# Altium PCB PC110-itx.PcbDoc (part 15 of 16)
Units mm, origin at the board's own origin, x right, y up, seen from the top; angles counter-clockwise.
Board outline 170 x 170 mm, 16 copper layers (FC1, FC2, FC3, FC4, IP1, IC1, IC2, IP2, IP3, IC3, IC4, IP4, BC4, BC3, BC2, BC1), stack 3.903 mm thick; 935 components, 1357 nets, 4698 pads, 3240 vias.
Unrouted connection lines stored in the file: 552.
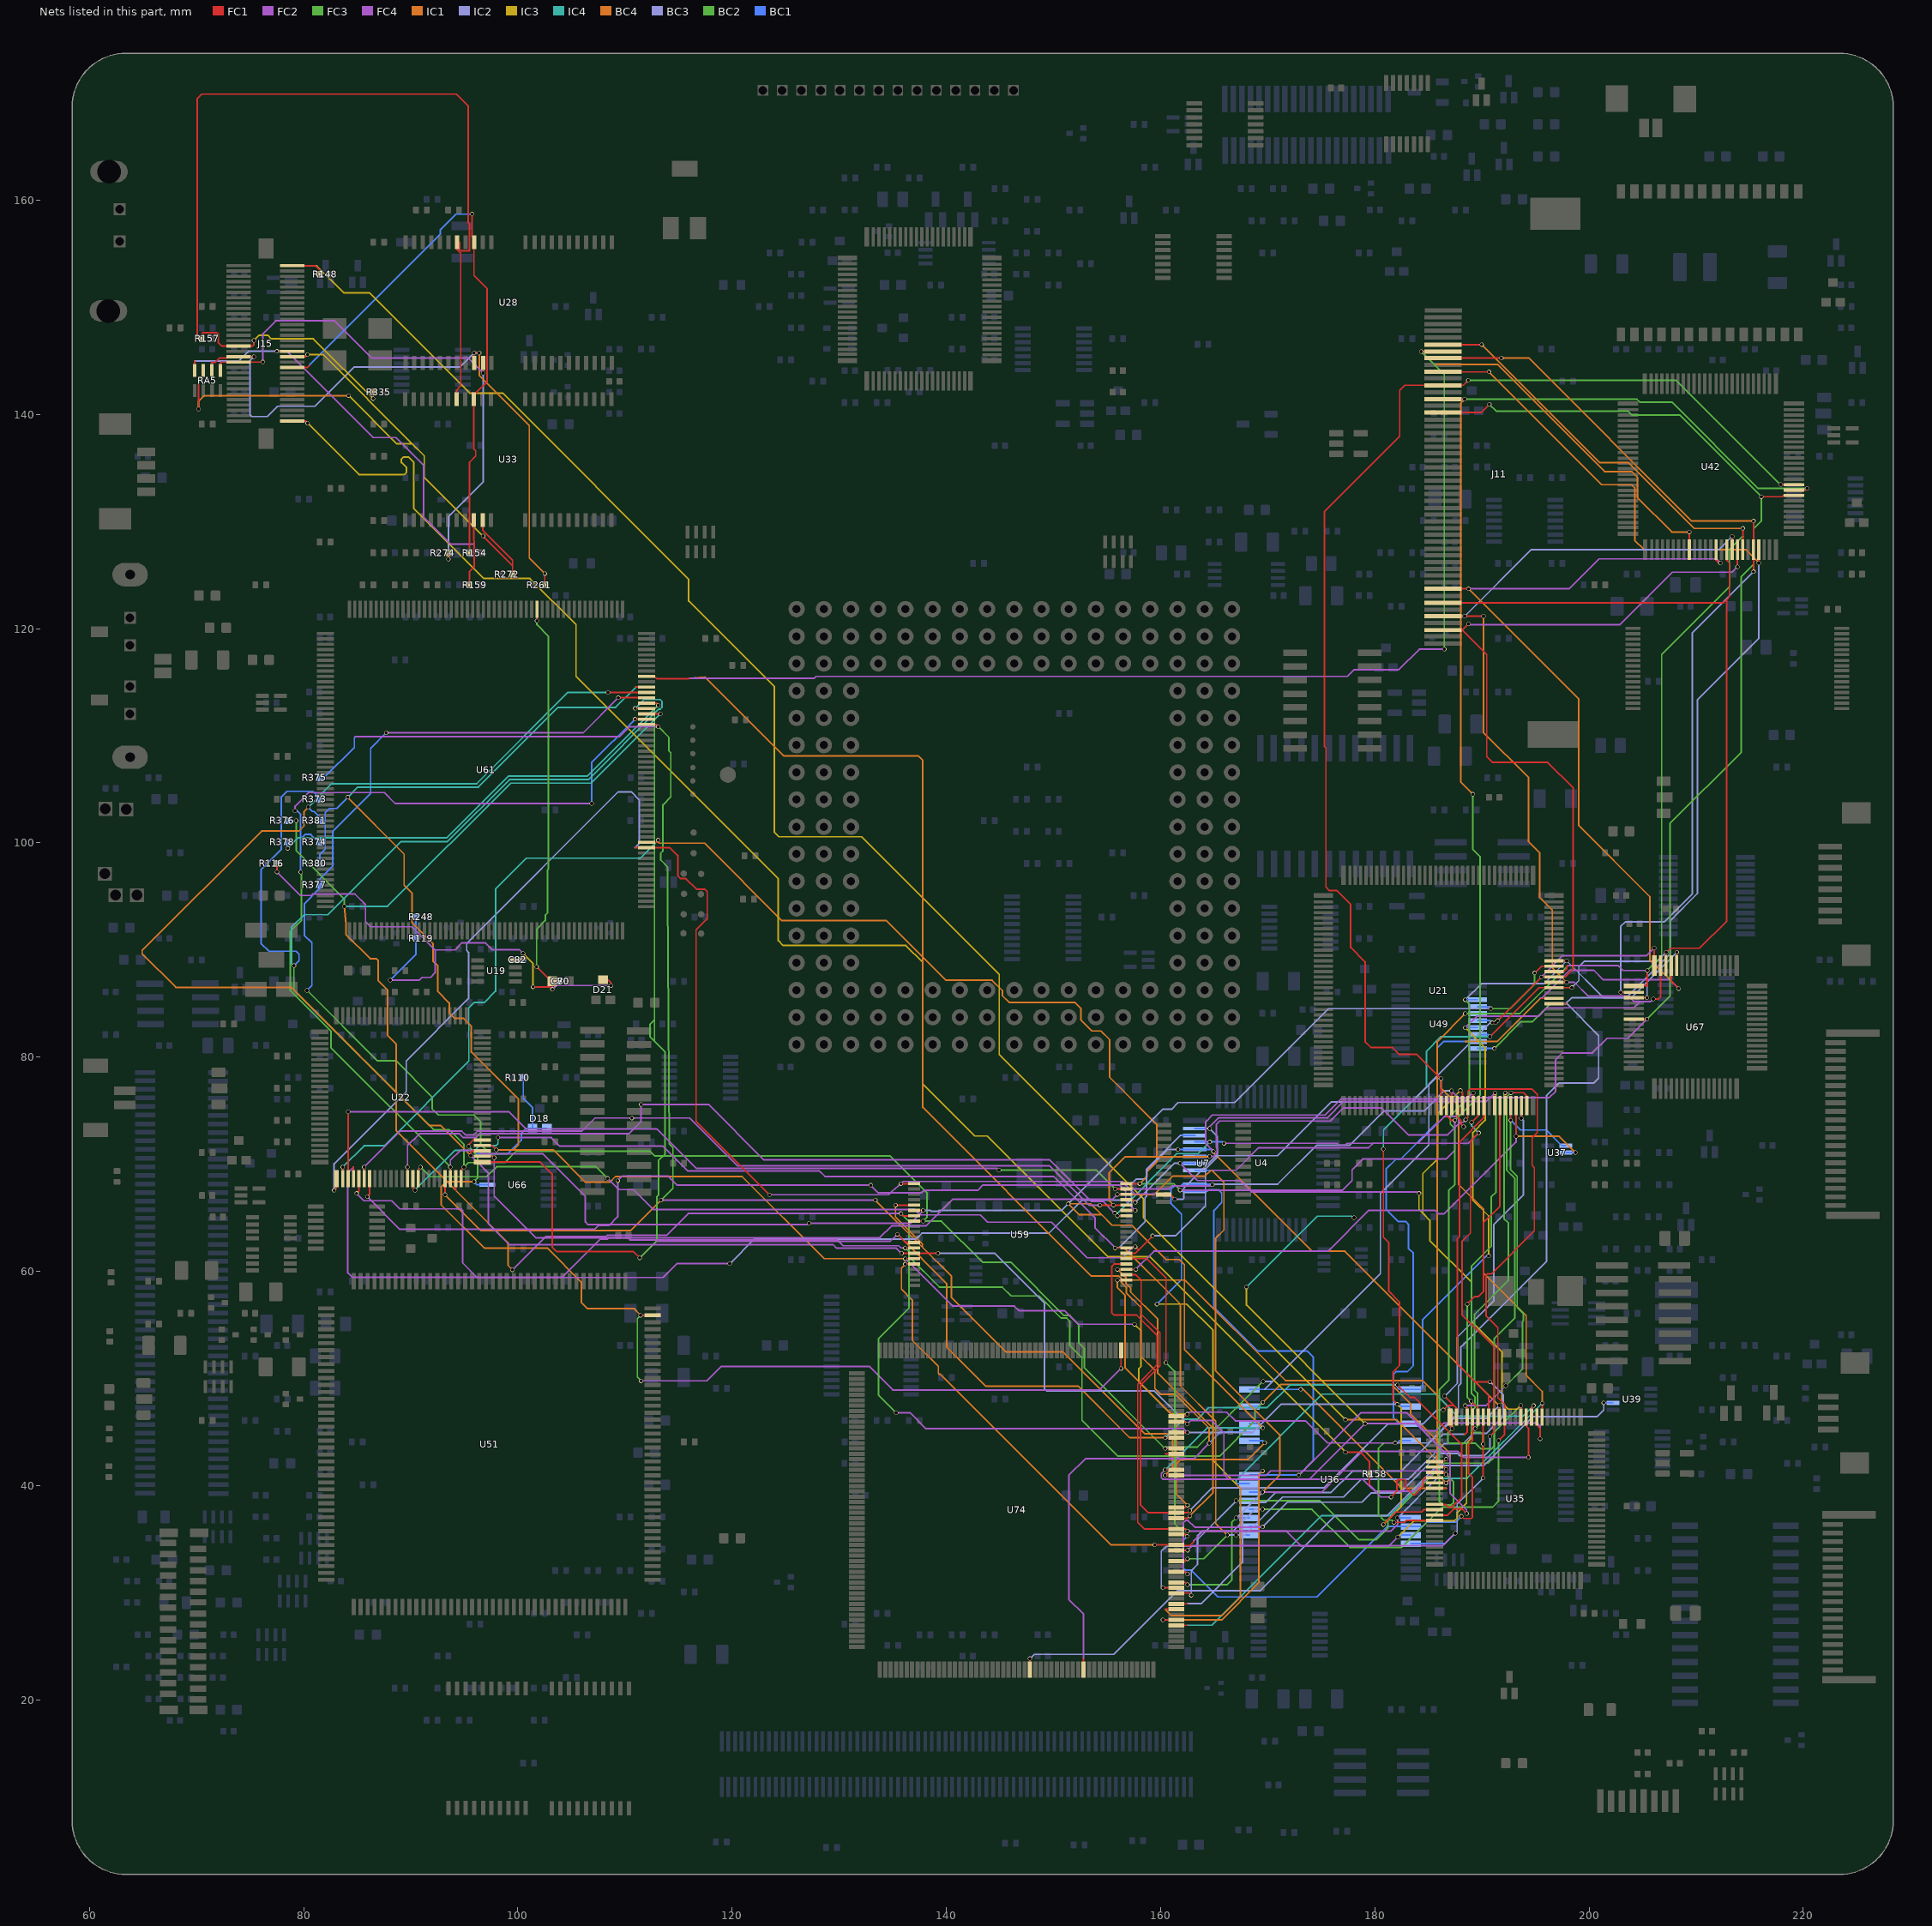
[diagram p28: the nets of this part, all layers, seen from the top]

## Via types
v1: diameter 0.4, hole 0.3, FC1 to BC1, 3240 vias

## Nets (pads, with @x,y where several pads share a name; then routed paths per layer and width w, separated by ;. In a path a pad name is that pad's centre, name@x,y a point inside that pad or via, vN(x,y) a via of type N, cw(c..) or ccw(c..) an arc to the next point about the centre after c; other vN are vias at no path point) (continued)
RAM_A11: J15.15 R157.1 R335.1 U28.16 U33.16 | length 100.3
  FC1 w0.15: v1(75.362,146.914) 75.362,146.507 75.247,146.392 J15.15@73.928,146.392 72.339,146.392 72.034,146.697 72.034,147.523 71.933,147.625 70.592,147.625 70.49,147.523 R157.1@70.49,147.09 70.182,147.09 70.053,147.218 70.053,169.469 70.485,169.901 94.259,169.901 95.377,168.783 95.377,157.886 95.479,157.785 95.479,155.27 94.691,155.27 94.564,155.397 94.564,156.082 U28.16@94.308,156.082 94.308,155.397 94.666,155.039 94.666,142.669 94.287,142.291 U33.16@94.287,141.423 ; v1(86.49,141.478) R335.1@86.49,142.09
  IC3 w0.15: v1(75.362,146.914) 75.844,147.396 76.657,147.396 76.987,147.066 80.902,147.066 v1(86.49,141.478)
RAM_ID0: J15.60 R158.1 U35.31 | length 171
  FC1 w0.15: J15.60@78.928,139.393 80.165,139.393 v1(80.366,139.192) ; v1(177.267,43.129) 178.626,43.129 179.49,42.266 R158.1@179.49,41.09 179.49,40.093 ; U35.31@185.57,42.25 186.446,42.25 v1(186.665,42.469)
  IC3 w0.15: v1(80.366,139.192) 85.166,134.391 89.408,134.391 89.611,134.595 89.611,135.026 89.129,135.509 89.129,135.839 89.306,136.017 89.814,136.017 90.272,135.56 90.272,131.242 96.825,124.688 101.118,124.688 105.426,120.38 105.426,115.554 124.308,96.672 124.308,90.881 124.765,90.424 136.22,90.424 137.795,88.849 137.795,77.495 142.646,72.644 143.815,72.644 155.092,61.366 159.029,61.366 v1(177.267,43.129)
  FC4 w0.15: 179.49,40.093 180.111,39.472 183.667,39.472 v1(186.665,42.469)
RAM_ID1: J15.31 R148.1 U35.32 | length 173.1
  FC1 w0.15: 81.102,153.893 J15.31@78.928,153.893 81.175,153.819 81.49,153.505 R148.1@81.49,153.09 ; U35.32@185.57,41.75 186.444,41.75 v1(186.665,41.529)
  IC3 w0.15: 81.102,153.893 81.229,153.873 83.744,151.359 86.125,151.359 95.488,141.995 98.568,141.995 115.951,124.612 115.951,122.58 123.952,114.579 123.952,100.99 124.358,100.584 132.08,100.584 144.932,87.732 144.932,80.263 158.394,66.801 158.394,65.025 v1(177.267,46.152)
  BC4 w0.15: v1(177.267,46.152) 182.042,46.152 v1(186.665,41.529)
RAM_LCASL#: J15.48 R272.2 RA5.3 U33.32 | length 62.7
  FC1 w0.15: v1(70.18,140.513) 70.18,143.218 70.625,143.662 RA5.3@70.625,144.09 ; J15.48@78.928,145.392 80.162,145.392 v1(80.366,145.596) ; U33.32@96.738,130.148 96.738,129.21 96.749,129.152 99.51,126.39 99.51,125.89 ; v1(96.749,128.651) 99.51,125.89 ; R272.2@99.51,125.09 99.51,125.89
  IC1 w0.15: v1(70.18,140.513) 70.18,141.224 70.714,141.757 v1(84.201,141.757)
  IC3 w0.15: v1(80.366,145.596) 81.811,145.596 90.145,137.262 ; v1(84.201,141.757) 88.697,137.262 90.145,137.262 ; v1(96.749,128.651) 91.262,134.137 91.262,136.144 90.145,137.262
RAM_LCASU#: J15.12 R274.2 RA5.1 U28.32 | length 50.7
  FC1 w0.15: RA5.1@72.225,144.09 72.225,144.78 72.338,144.893 J15.12@73.928,144.893 v1(76.2,144.893) ; v1(93.51,126.492) R274.2@93.51,127.09 ; v1(96.757,143.877) U28.32@96.757,144.807
  FC4 w0.15: v1(76.2,144.893) 76.2,147.549 77.399,148.748 82.9,148.748 86.385,145.263 95.372,145.263 v1(96.757,143.877)
  BC3 w0.15: v1(93.51,126.492) 93.51,130.442 96.773,133.705 96.773,143.861 v1(96.757,143.877)
RAM_UCASL#: J15.47 R159.1 RA5.4 U33.31 | length 45.4
  FC1 w0.15: RA5.4@69.825,144.09 69.825,144.983 ; v1@77.5,145.893 J15.47@78.928,145.893 ; R159.1@95.49,124.09 95.49,125.36 95.936,125.806 95.936,127.889 ; U33.31@95.887,130.148 95.887,128.529 95.936,127.893
  IC2 w0.15: 69.825,144.983 73.939,144.983 74.854,145.898 v1(77.495,145.898) v1@77.5,145.893
  FC4 w0.15: v1(77.495,145.898) 78.461,145.898 86.512,137.846 88.621,137.846 91.211,135.255 91.211,130.404 93.726,127.889 95.887,127.889 ; 95.936,127.889 95.887,127.889 ; 95.936,127.893 95.887,127.889
RAM_UCASU#: J15.13 R261.2 RA5.2 U28.31 | length 59.6
  FC1 w0.15: RA5.2@71.425,144.09 71.425,144.856 71.736,144.856 72.136,145.256 72.847,145.256 72.847,145.392 J15.13@73.928,145.392 v1(75.362,145.392) ; U28.31@95.908,144.807 v1(95.908,145.745) v1(96.393,145.745) ; R261.2@102.51,124.09 v1(102.51,125.15)
  IC1 w0.15: v1(96.393,145.745) 96.393,143.637 101.067,138.963 101.067,126.594 v1(102.51,125.15)
  BC3 w0.15: v1(75.362,145.392) 74.981,145.011 74.981,140.005 75.184,139.802 76.606,139.802 77.572,140.767 81.051,140.767 84.709,144.424 94.587,144.424 v1(95.908,145.745)
RAMWE#: J15.50 R154.1 U28.14 U33.14 | length 56.2
  FC1 w0.15: J15.50@78.928,144.392 80.366,144.392 80.543,144.57 ; R154.1@95.49,127.09 95.49,135.543 96.062,136.116 96.062,136.604 95.887,136.778 U33.14@95.887,141.423 95.887,142.037 96.114,142.037 97.13,143.053 97.13,151.74 95.908,152.962 U28.14@95.908,156.082 95.908,156.54 95.733,156.54 v1(95.733,158.699)
  BC1 w0.15: 80.543,144.57 80.543,144.596 92.761,156.813 92.761,157.226 94.234,158.699 v1(95.733,158.699)
RESET: D18.1 D18.3 R110.1 U22.55 U51.159 U66.11 U74.7 | length 106
  FC1 w0.15: v1(95.405,71.653) 95.405,71.857 95.809,72.26 U22.55@96.7,72.26 ; v1(111.455,55.905) U51.159@112.57,55.905 ; v1(156.308,50.938) U74.7@156.308,52.619
  FC3 w0.15: v1(95.405,71.653) 96.241,70.818 96.241,68.707 v1(95.91,68.377) ; v1(111.455,55.905) 111.15,55.601 111.15,50.14 v1(111.506,49.784)
  FC4 w0.15: v1(111.506,49.784) 117.653,49.784 118.999,51.13 132.803,51.13 135.001,48.932 154.302,48.932 v1(156.308,50.938)
  BC4 w0.15: v1(95.91,68.377) 93.345,68.377 92.837,67.869 92.837,66.218 96.876,62.179 102.743,62.179 105.918,59.004 105.918,57.099 106.477,56.54 110.819,56.54 v1(111.455,55.905)
  BC1 w0.15: v1(95.405,71.653) 96.091,70.968 99.035,70.968 100.33,72.263 100.33,72.908 100.787,73.365 D18.1@101.375,73.365 ; v1(95.91,68.377) 96.197,68.09 U66.11@97.138,68.09 ; R110.1@100.51,78.09 100.51,76.151 101.375,75.286 D18.1@101.375,73.365 ; D18.3@102.7,73.365 D18.1@101.375,73.365
RIOUT#: U39.6 U74.133 | length 65.8
  FC1 w0.15: U74.133@147.808,22.819 v1(147.808,23.851)
  IC2 w0.15: v1(147.808,23.851) 148.204,24.247 155.615,24.247 161.576,30.208 169.323,30.208 176.317,37.201 181.143,37.201 185.837,41.895 190.206,41.895 194.767,46.457 200.762,46.457 201.371,47.066 v1(201.371,47.74)
  BC1 w0.15: v1(201.371,47.74) U39.6@202.25,47.74
RTCBAT: C70.2 C80.1 C82.1 D21.2 R116.2 R119.2 R248.2 U19.8 U61.69 | length 95
  FC1 w0.15: v1(77.51,97.293) R116.2@77.51,98.09 ; U19.8@99.75,89.04 100.381,89.04 100.482,89.142 v1(100.482,89.687) ; v1(101.422,86.563) 102.698,86.563 ; v1(101.752,88.436) 103.099,87.09 C80.1@103.225,87.09 ; v1(101.778,120.726) U61.69@101.778,121.807 ; v1(103.225,86.335) C80.1@103.225,87.09 ; D21.2@107.95,87.215 108.441,87.215 108.687,86.97 v1(108.687,86.69) ; 102.698,86.563 102.997,86.563 C80.1@103.225,87.09 ; 102.698,86.563 C80.1@103.225,87.09
  FC2 w0.15: v1(103.225,86.335) 103.58,86.69 v1(108.687,86.69)
  FC3 w0.15: v1(101.752,88.436) 101.752,91.949 102.565,92.761 102.565,93.269 102.768,93.473 102.768,97.485 102.845,97.561 102.845,119.31 101.778,120.376 v1(101.778,120.726)
  IC3 w0.15: v1(100.482,89.687) 101.422,88.748 v1(101.422,86.563)
  FC4 w0.15: v1(77.51,97.293) 79.705,95.098 80.721,95.098 80.848,95.225 84.797,95.225 85.776,94.245 85.776,92.659 86.258,92.177 90.119,92.177 92.278,90.018 ; v1(88.087,87.198) 90.804,87.198 91.057,87.452 91.846,87.452 92.278,87.883 92.278,90.018 ; v1@100.48,89.685 v1(100.482,89.687) 100.127,90.043 97.587,90.043 96.952,90.678 94.793,90.678 94.132,90.018 92.278,90.018
  BC1 w0.15: v1(88.087,87.198) 90.49,89.601 R119.2@90.49,91.09 R248.2@90.49,93.09 ; C82.1@100.48,89.09 v1@100.48,89.685 ; v1(103.225,86.335) 103.52,86.63 C70.2@103.52,87.09
SA0: J11.39 U7.11 U21.55 U22.26 U35.8 U42.35 U59.21 U61.12 U74.161 | length 365.3
  FC1 w0.15: v1(82.847,67.564) 83.05,67.767 U22.26@83.05,68.66 ; 110.958,99.557 U61.12@112.028,99.557 114.198,99.557 114.924,98.832 114.924,96.963 115.214,96.672 115.692,96.672 116.683,95.682 117.45,95.682 117.678,95.453 117.678,92.95 116.637,91.909 116.637,74.016 v1(123.495,67.158) ; v1(135.764,68.19) U59.21@137,68.19 ; U7.11@160.288,67.165 160.96,67.165 v1(161.335,66.729) ; U74.161@161.458,26.969 162.503,26.969 ; U21.55@186.182,75.491 v1(186.182,78.003) 183.921,80.264 182.296,80.264 181.653,80.907 179.629,80.907 179.088,81.448 179.088,88.906 177.749,90.244 177.749,94.259 176.459,95.55 175.768,95.55 175.438,95.88 175.438,108.864 175.311,108.991 175.311,130.962 182.321,137.973 182.321,142.24 182.804,142.722 J11.39@186.358,142.722 188.265,142.722 v1(188.722,143.18) ; U35.8@195.62,46.4 v1@195.62,47.69 ; v1(217.883,133.452) 217.884,133.45 U42.35@219.127,133.45
  FC2 w0.15: v1(123.495,67.158) 134.623,67.158 134.934,67.469 v1(135.764,68.19)
  IC1 w0.15: v1(186.182,78.003) 186.182,77.114 187.832,75.464 187.832,68.098 190.148,65.782 190.148,59.839 194.132,55.855 194.132,50.292 195.631,48.793 v1(195.631,47.701) v1@195.62,47.69
  IC2 w0.15: v1(161.335,66.729) 162.052,66.729 162.175,66.852 162.175,67.789 165.186,70.799 170.912,70.799 175.932,75.819 183.454,75.819 185.638,78.003 v1(186.182,78.003)
  IC4 w0.15: 162.503,26.969 162.509,26.975 164.795,26.975 175.022,37.201 181.408,37.201 184.898,40.692 188.621,40.692 v1(195.631,47.701)
  FC4 w0.15: v1(135.764,68.19) 135.976,68.402 156.413,68.402 157.578,67.237 160.827,67.237 v1(161.335,66.729)
  BC2 w0.15: v1(188.722,143.18) 208.155,143.18 v1(217.883,133.452)
  BC3 w0.15: v1(82.847,67.564) 82.847,70.045 89.579,76.777 89.579,79.647 95.402,85.471 95.402,89.785 95.22,89.967 95.22,90.622 109.372,104.775 110.592,104.775 111.328,104.038 111.328,99.949 110.947,99.568 110.958,99.557
SA1: J11.37 U4.42 U21.56 U22.27 U35.9 U36.13 U42.34 U59.20 U61.13 U74.162 | length 360
  FC1 w0.15: U22.27@83.65,68.66 v1(83.65,69.748) ; U61.13@112.028,100.057 112.987,100.057 v1(113.108,100.26) ; U59.20@156.8,68.19 v1(158.064,68.19) ; v1(160.223,27.469) U74.162@161.458,27.469 ; J11.37@186.358,141.423 v1@188.387,141.423 ; U21.56@186.682,75.491 186.682,74.549 187.114,74.117 v1(187.477,74.117) ; U35.9@195.12,46.4 195.12,45.669 195.428,45.361 v1(195.428,44.374) ; U42.34@219.127,132.95 220.224,132.95 v1(220.37,133.096)
  FC3 w0.15: v1(187.477,74.117) 189.814,76.454 189.814,98.73 189.154,99.39 v1(189.154,104.546)
  IC1 w0.15: v1(160.223,27.469) 165.696,27.469 169.164,30.937 169.164,41.021 v1(169.52,41.377) ; v1(188.392,141.427) 188.387,141.423 188.011,141.046 188.011,105.689 v1(189.154,104.546)
  IC4 w0.15: v1(83.65,69.748) 85.64,71.738 87.537,71.738 95.427,79.628 95.427,84.612 95.91,85.095 96.862,85.095 97.923,86.157 97.923,95.713 100.787,98.577 111.425,98.577 v1(113.108,100.26)
  FC4 w0.15: v1(161.82,67.589) 176.987,67.589 177.876,68.478 177.876,69.494 178.867,70.485 186.639,70.485 187.477,71.323 v1(187.477,74.117) ; v1(172.898,40.99) 178.72,46.812 182.963,46.812 184.639,45.137 185.726,45.137 186.436,45.847 195.153,45.847 195.428,45.573 v1(195.428,44.374)
  BC2 w0.15: v1(158.064,68.19) 161.219,68.19 v1(161.82,67.589) v1@161.919,67.49 ; v1(188.392,141.427) 204.47,141.427 204.749,141.148 207.747,141.148 215.798,133.096 v1(220.37,133.096)
  BC4 w0.15: v1(113.108,100.26) 113.108,100.057 113.191,99.974 117.424,99.974 124.658,92.74 134.412,92.74 139.968,87.185 144.272,87.185 145.227,86.23 145.227,85.75 145.857,85.12 151.994,85.12 152.573,84.541 152.573,83.444 153.568,82.448 154.432,82.448 155.244,81.636 155.244,78.131 159.639,73.736 159.639,70.218 158.712,69.291 158.712,68.838 v1(158.064,68.19)
  BC1 w0.15: v1@161.919,67.49 U4.42@163.2,67.49 164.34,67.49 164.49,67.64 165.405,67.64 165.71,67.335 165.71,66.421 164.973,65.684 164.973,56.642 169.037,52.578 173.685,52.578 174.244,52.019 174.244,42.336 v1(172.898,40.99) 169.24,40.99 ; U36.13@168.29,40.99 169.24,40.99 ; v1(169.52,41.377) 169.24,41.097 169.24,40.99
SA2: J11.35 U4.43 U21.57 U22.28 U35.10 U36.12 U42.33 U59.19 U67.7 U74.164 | length 325.4
  FC1 w0.15: U22.28@84.15,68.66 v1(84.15,74.905) ; v1(155.77,67.691) U59.19@156.8,67.69 ; 160.431,28.469 U74.164@161.458,28.469 ; J11.35@186.358,140.172 189.916,140.172 v1(190.688,140.945) ; U21.57@187.182,75.491 v1@187.182,76.849 ; U35.10@194.62,46.4 194.62,47.275 v1(194.818,47.473) ; U67.7@204.185,83.558 v1(205.415,83.558) ; v1(216.093,132.319) 218.009,132.319 218.14,132.45 U42.33@219.127,132.45
  FC2 w0.15: v1(84.15,74.905) 99.135,74.905 100.735,73.304 112.954,73.304 116.636,69.622 144.754,69.622 v1(144.907,69.469) ; v1(155.77,67.691) v1(155.77,67.691) 160.757,67.691 161.036,67.97 164.71,67.97 v1(164.838,68.097)
  FC3 w0.15: v1(205.415,83.558) 207.543,85.686 207.543,101.803 214.217,108.477 214.217,124.86 215.341,125.984 215.341,129.337 216.093,130.088 v1(216.093,132.319)
  IC1 w0.15: 160.431,28.469 161.036,27.864 165.71,27.864 167.437,29.591 167.437,39.776 167.03,40.183
  IC2 w0.15: v1(164.838,68.097) 164.795,68.14 164.838,68.14 170.934,68.14 174.569,71.775 177.643,71.775 180.848,74.981 184.607,74.981 186.495,76.868 v1(187.163,76.868)
  IC3 w0.15: v1(159.664,56.947) 162.447,56.947 164.897,54.497 164.897,42.335 167.041,40.19 ; 167.03,40.183 167.041,40.19 ; 167.056,40.183 167.041,40.19 ; 167.056,40.19 167.041,40.19
  IC4 w0.15: 167.056,40.183 167.056,40.507 175.094,48.545 185.668,48.545 187.731,46.482 193.827,46.482 v1(194.818,47.473)
  FC4 w0.15: v1(187.163,76.868) 187.182,76.849 187.806,76.225 196.291,76.225 196.875,76.81 196.875,79.756 197.51,80.391 200.304,80.391 201.676,81.763 203.62,81.763 v1(205.415,83.558)
  BC2 w0.15: v1(144.907,69.469) 153.992,69.469 v1(155.77,67.691) ; v1(190.688,140.945) 191.323,140.31 203.632,140.31 203.987,139.954 208.458,139.954 v1(216.093,132.319)
  BC1 w0.15: v1(159.664,56.947) 161.95,59.233 161.95,65.354 160.96,66.344 160.96,67.666 161.265,67.97 161.882,67.97 162.052,68.14 U4.43@163.2,68.14 v1@164.795,68.14 ; 167.056,40.19 U36.12@168.29,40.19
SA3: U4.45 U21.58 U22.29 U35.11 U36.11 U59.18 U74.165 | length 207.7
  FC1 w0.15: U22.29@84.65,68.66 84.65,69.74 ; v1(155.97,67.19) U59.18@156.8,67.19 ; U74.165@161.458,28.969 162.497,28.969 ; U21.58@187.682,75.491 187.682,74.447 188.036,74.093 188.036,73.762 v1(188.29,73.508) ; U35.11@194.12,46.4 194.12,45.58 194.335,45.364 v1(194.335,42.647)
  IC1 w0.15: v1(155.97,67.19) 159.417,67.19 161.138,68.91 164.164,68.91 164.694,69.44 164.807,69.44 165.913,68.334 165.913,63.856 165.125,63.068 165.125,50.749 171.12,44.755 171.12,40.99 v1(169.52,39.39)
  FC4 w0.15: 84.65,69.74 84.125,69.215 84.125,59.868 84.531,59.461 104.14,59.461 107.689,63.011 108.358,63.011 108.485,63.138 133.781,63.138 134.886,64.242 138.106,64.242 140.614,66.751 155.531,66.751 v1(155.97,67.19) ; 164.807,69.44 167.05,69.44 169.155,71.545 179.419,71.545 179.832,71.958 184.023,71.958 186.538,74.473 187.731,74.473 187.833,74.371 187.833,73.965 v1(188.29,73.508) ; v1(169.52,39.39) 175.026,39.39 178.842,43.206 187.73,43.206 188.29,42.647 v1(194.335,42.647)
  BC3 w0.15: 162.497,28.969 162.509,28.981 163.779,28.981 167.64,32.842 167.64,37.51 v1(169.52,39.39)
  BC1 w0.15: U4.45@163.2,69.44 164.69,69.44 ; U36.11@168.29,39.39 v1(169.52,39.39)
SA4: U4.46 U21.59 U22.30 U35.12 U36.10 U59.17 U74.167 | length 203.5
  FC1 w0.15: v1(84.947,67.285) 85.15,67.488 U22.30@85.15,68.66 ; U59.17@156.8,66.69 157.389,66.69 v1(157.632,66.446) ; U74.167@161.458,29.969 162.665,29.969 v1(162.865,29.769) ; v1(187.985,76.886) 188.182,76.689 U21.59@188.182,75.491 ; U35.12@193.62,46.4 v1(193.62,47.48)
  FC2 w0.15: v1(84.947,67.285) 85.633,66.598 88.235,66.598 88.997,65.836 94.691,65.836 94.844,65.684 94.844,60.79 96.198,59.436 113.538,59.436 114.833,60.731 v1(119.786,60.731) ; v1(161.82,70.09) 163.432,68.478 167.437,68.478 168.487,67.429 183.981,67.429 v1(184.125,67.285)
  IC2 w0.15: v1(119.786,60.731) 122.072,63.017 137.16,63.017 137.719,63.576 149.581,63.576 152.654,66.65 157.429,66.65 v1(157.632,66.446)
  IC3 w0.15: v1(184.125,67.285) 184.125,65.786 184.48,65.43 ; v1(187.985,76.886) 185.877,74.778 185.877,70.536 184.48,69.139 184.48,65.43 ; v1(193.62,47.48) 193.282,47.142 192.46,47.142 191.872,47.73 191.872,52.476 189.027,55.321 189.027,58.978 185.141,62.865 185.141,64.77 184.48,65.43
  BC2 w0.15: v1(167.06,38.59) 174.872,38.59 178.511,34.95 180.135,34.95 181.217,36.032 181.217,36.811 186.504,42.098 190.587,42.098 191.16,42.672 191.16,45.02 v1(193.62,47.48)
  BC3 w0.15: v1(157.632,66.446) 161.276,70.09 v1(161.82,70.09) ; v1(162.865,29.769) 162.865,32.055 163.449,32.639 163.449,34.979 v1(167.06,38.59)
  BC1 w0.15: v1(161.82,70.09) U4.46@163.2,70.09 ; v1(167.06,38.59) U36.10@168.29,38.59
SA5: U4.47 U21.60 U22.31 U35.15 U36.9 U59.16 U74.168 | length 215.1
  FC1 w0.15: U22.31@85.65,68.66 v1(85.65,69.748) ; v1(154.333,66.19) v1(155.6,66.19) U59.16@156.8,66.19 ; v1(160.223,30.48) 160.234,30.469 U74.168@161.458,30.469 ; v1(188.479,74.159) 188.682,74.362 U21.60@188.682,75.491 188.682,76.81 188.911,77.038 194.666,77.038 195.174,76.53 195.174,72.974 194.692,72.492 194.692,69.901 194.894,69.698 194.894,63.786 190.874,59.766 190.5,59.766 190.373,59.639 190.373,55.855 191.491,54.737 191.491,48.229 192.12,47.6 U35.15@192.12,46.4 192.12,44.775 v1(191.541,44.196)
  FC2 w0.15: v1(110.642,74.32) 116.053,74.32 120.521,69.852 149.655,69.852 153.317,66.19 v1(154.333,66.19) ; v1@164.528,70.688 v1(164.58,70.74) 164.998,70.74 165.328,71.069 165.328,71.473 165.222,71.579 165.222,73.762 165.501,74.041 175.82,74.041 177.039,75.26 180.649,75.26 183.173,72.737 186.777,72.737 187.96,73.919 188.239,73.919 v1(188.479,74.159)
  IC1 w0.15: v1(155.6,66.19) 155.211,66.58 155.211,69.232 156.667,70.688 v1@164.528,70.688
  IC2 w0.15: v1(160.223,30.48) 160.071,30.632 160.071,33.884 160.528,34.341 163.246,34.341 163.449,34.544 163.449,35.357 163.855,35.763 166.776,35.763 168.803,37.79 v1(169.52,37.79)
  FC4 w0.15: v1(85.65,69.748) 89.003,73.101 94.762,73.101 95.135,72.729 95.845,72.729 96.218,73.101 105.993,73.101 107.212,74.32 v1(110.642,74.32)
  BC2 w0.15: v1(169.52,37.79) 174.122,37.79 177.673,34.239 182.524,34.239 186.284,37.998 191.008,37.998 191.541,38.532 v1(191.541,44.196)
  BC1 w0.15: U4.47@163.2,70.74 v1(164.58,70.74) ; U36.9@168.29,37.79 v1(169.52,37.79)
SA6: U4.48 U21.61 U22.32 U35.16 U36.8 U59.15 U74.169 | length 203.6
  FC1 w0.15: v1(85.947,66.98) 86.15,67.183 U22.32@86.15,68.66 ; U59.15@156.8,65.69 v1(157.63,65.69) ; U74.169@161.458,30.969 162.3,30.969 v1(162.509,30.759) ; U21.61@189.182,75.491 v1(189.182,76.671) ; U35.16@191.62,46.4 v1(191.62,47.48)
  FC2 w0.15: v1(109.322,68.478) 109.728,68.884 114.045,68.884 114.883,68.047 v1(132.944,68.047) ; v1(164.948,71.196) 164.211,71.933 164.211,73.965 164.846,74.6 175.341,74.6 176.839,76.098 188.609,76.098 v1(189.182,76.671)
  IC2 w0.15: v1(167.06,36.99) 168.5,38.43 169.799,38.43 170.713,39.345 175.895,39.345 177.901,41.351 182.448,41.351 187.395,46.298 190.438,46.298 v1(191.62,47.48)
  FC4 w0.15: v1(85.947,66.98) 88.996,63.931 107.163,63.931 107.519,64.287 108.509,64.287 109.322,65.1 v1(109.322,68.478) ; v1(132.944,68.047) 133.655,67.335 137.668,67.335 137.897,67.564 142.926,67.564 143.434,68.072 156.134,68.072 156.743,67.462 156.743,66.577 v1(157.63,65.69)
  BC2 w0.15: v1(162.509,30.759) 166.218,30.759 166.649,31.191 166.649,36.579 v1(167.06,36.99)
  BC4 w0.15: v1(164.948,71.196) 164.948,71.083 174.142,61.888 177.212,61.888 v1(191.62,47.48)
  BC3 w0.15: v1(157.63,65.69) 157.277,66.043 157.277,68.174 157.734,68.631 158.496,68.631 158.699,68.834 158.699,69.444 160.63,71.374 v1(161.62,71.374)
  BC1 w0.15: v1(161.62,71.374) 161.636,71.39 U4.48@163.2,71.39 164.754,71.39 v1(164.948,71.196) ; v1(167.06,36.99) U36.8@168.29,36.99
SA7: U4.49 U21.62 U22.39 U35.17 U36.7 U59.14 U74.171 | length 190.1
  FC1 w0.15: U22.39@89.7,68.66 v1(89.7,69.748) ; v1(155.97,65.19) U59.14@156.8,65.19 ; U74.171@161.458,31.969 162.29,31.969 v1(162.509,31.75) ; v1(189.027,73.919) 189.682,74.574 U21.62@189.682,75.491 ; v1(189.687,72.923) 188.925,72.161 188.925,63.576 188.138,62.789 188.138,55.956 191.12,52.974 U35.17@191.12,46.4 191.12,44.968 v1(190.754,44.602)
  FC2 w0.15: v1(111.506,75.59) 117.78,75.59 122.936,70.434 149.631,70.434 153.521,66.545 154.615,66.545 v1(155.716,65.444) ; v1(165.913,71.958) 176.492,71.958 176.675,71.775 177.202,71.775 177.385,71.958 188.722,71.958 v1(189.687,72.923)
  IC2 w0.15: v1(169.52,36.144) 171.831,38.456 178.791,38.456 179.642,39.307 182.309,39.307 186.005,43.003 187.73,43.003 187.934,42.799 190.195,42.799 190.754,43.358 v1(190.754,44.602)
  IC4 w0.15: v1(155.716,65.444) 155.97,65.444 ; v1(155.97,65.19) 155.97,65.444 ; v1(164.592,72.09) 163.5,70.998 161.523,70.998 155.97,65.444 ; v1(189.027,73.919) 189.027,73.584 v1(189.687,72.923)
  FC4 w0.15: v1(89.7,69.748) 89.7,71.742 90.805,72.847 94.556,72.847 94.905,72.499 96.075,72.499 96.424,72.847 110.37,72.847 111.506,73.984 v1(111.506,75.59) ; v1(162.509,31.75) 162.128,32.131 162.128,36.525 162.357,36.754 162.56,36.754 163.195,36.119 169.494,36.119 v1(169.52,36.144) v1@169.474,36.19
  BC1 w0.15: U4.49@163.2,72.09 v1(164.592,72.09) 165.781,72.09 v1(165.913,71.958) ; U36.7@168.29,36.19 v1@169.474,36.19
SA8: U4.50 U21.63 U22.40 U35.18 U36.6 U59.8 U74.173 | length 194.8
  FC1 w0.15: U22.40@90.2,68.66 90.2,67.781 v1(90.399,67.582) ; v1(155.767,62.19) U59.8@156.8,62.19 ; U74.173@161.458,32.969 162.306,32.969 v1(162.509,33.172) ; U21.63@190.182,75.491 190.182,74.371 187.909,72.098 187.909,63.271 187.706,63.068 187.706,51.326 189.332,49.701 ; U35.18@190.62,46.4 190.62,48.412 189.332,49.701 ; v1(190.754,49.701) 189.332,49.701
  FC2 w0.15: v1(98.146,72.492) 103.124,72.492 103.927,71.689 113.557,71.689 115.853,69.392 128.143,69.392 128.676,68.859 150.038,68.859 153.873,65.024 153.873,64.084 v1(155.767,62.19)
  IC1 w0.15: v1(155.767,62.19) 156.591,62.19 161.849,56.932 161.849,49.327 165.151,46.025 165.151,36.474 v1(166.235,35.39)
  IC2 w0.15: v1(155.767,62.19) 156.119,62.19 158.547,64.618 158.547,66.88 158.699,67.032 158.699,69.545 161.844,72.69 ; v1(166.235,35.39) v1(167.056,35.39) 167.851,35.39 171.399,38.938 177.063,38.938 178.714,40.589 183.133,40.589 186.467,43.922 188.245,43.922 189.205,44.882 190.398,44.882 191.999,46.482 191.999,48.456 v1(190.754,49.701)
  IC4 w0.15: v1(90.399,67.582) 94.114,71.298 95.964,71.298 96.395,71.73 97.942,71.73 98.146,71.933 v1(98.146,72.492)
  BC2 w0.15: v1(162.509,33.172) 164.017,33.172 v1(166.235,35.39)
  BC1 w0.15: 161.844,72.69 U4.50@163.2,72.69 ; v1(167.056,35.39) U36.6@168.29,35.39
SA9: U4.51 U21.65 U22.41 U35.19 U36.44 U59.7 U74.175 | length 199.1
  FC1 w0.15: U22.41@90.7,68.66 90.7,69.538 v1(90.907,69.745) ; U59.7@156.8,61.69 157.632,61.69 157.941,61.998 ; v1(157.632,62.306) 157.941,61.998 ; v1(159.265,63.322) 157.941,61.998 ; U74.175@161.458,33.969 v1(162.509,33.969) ; v1(190.119,43.891) v1(190.119,43.891) U35.19@190.12,46.4 ; v1(190.12,40.719) v1(190.119,43.891) ; U21.65@191.182,75.491 v1@191.182,76.628
  FC2 w0.15: v1(108.382,68.682) 109.421,67.642 110.793,67.642 112.649,65.786 137.008,65.786 137.519,65.275 143.157,65.275 143.84,64.592 149.837,64.592 153.153,61.277 156.444,61.277 157.473,62.306 v1(157.632,62.306) ; v1(164.58,73.34) 164.58,73.527 165.392,74.339 175.563,74.339 177.091,75.868 190.422,75.868 v1(191.237,76.683)
  FC3 w0.15: v1(190.119,43.891) 190.119,44.704 189.865,44.958 189.154,44.958 189.001,45.11 189.001,46.939 189.356,47.294 189.356,48.259 189.027,48.589 189.027,60.506 190.856,62.334 190.856,66.954 191.313,67.412 191.313,76.606 v1(191.237,76.683) v1@191.182,76.628
  FC4 w0.15: v1(162.509,33.969) 162.932,34.392 186.337,34.392 v1(187.496,35.55)
  BC2 w0.15: v1(90.907,69.745) 91.818,68.834 97.079,68.834 98.013,69.769 107.295,69.769 v1(108.382,68.682)
  BC3 w0.15: v1(159.265,63.322) 161.392,63.322 164.186,66.116 164.186,69.571 165.303,70.688 165.303,72.617 v1(164.58,73.34) ; v1(187.496,35.55) 187.681,35.735 187.681,38.279 v1(190.12,40.719)
  BC1 w0.15: U4.51@163.2,73.34 v1(164.58,73.34) ; U36.44@183.365,34.59 186.536,34.59 v1(187.496,35.55)
SA10: U21.66 U35.20 U36.43 U59.36 U74.176 | length 113.7
  FC1 w0.15: v1(136.169,60.681) 136.179,60.69 U59.36@137,60.69 ; v1(159.461,34.469) U74.176@161.458,34.469 162.154,34.469 162.154,34.411 162.727,34.411 163.093,34.777 ; v1(188.62,56.947) 189.332,57.658 189.683,57.658 190.14,58.115 190.14,64.537 191.682,66.079 U21.66@191.682,75.491 ; v1(189.001,47.879) 189.62,47.26 U35.20@189.62,46.4
  FC2 w0.15: 163.093,34.777 163.093,34.874 163.982,35.763 171.729,35.763 173.126,34.366 181.314,34.366 v1(182.135,35.187)
  FC3 w0.15: v1(188.62,56.947) 188.62,48.26 v1(189.001,47.879)
  IC3 w0.15: v1(182.135,35.187) 183.677,36.729 187.453,36.729 187.706,36.982 187.706,37.516 188.57,38.379 188.57,43.993 189.001,44.425 v1(189.001,47.879)
  BC4 w0.15: v1(136.169,60.681) 135.814,60.325 135.814,58.344 136.83,57.328 136.83,53.569 139.25,51.149 139.25,50.495 139.351,50.394 139.453,50.394 155.378,34.469 v1(159.461,34.469)
  BC1 w0.15: v1(182.135,35.187) 182.338,35.39 U36.43@183.365,35.39
SA11: U21.67 U35.21 U36.42 U59.6 U74.178 | length 109.3
  FC1 w0.15: U59.6@156.8,61.19 158.723,61.19 160.503,59.411 v1(160.503,51.486) ; U74.178@161.458,35.469 162.285,35.469 v1(162.488,35.266) ; v1(188.08,37.143) 188.283,36.94 189.01,36.94 189.12,37.05 189.12,40.763 188.749,41.135 188.749,43.851 189.12,44.222 189.12,45.551 ; U35.21@189.12,46.4 189.12,45.551 ; v1(189.357,45.314) 189.12,45.551 ; v1(192.176,76.683) 192.182,76.677 U21.67@192.182,75.491
  FC3 w0.15: v1(160.503,51.486) 161.315,50.673 161.315,36.438 v1(162.488,35.266) ; v1(189.357,45.314) 189.586,45.543 189.586,48.64 189.306,48.92 189.306,56.007 192.481,59.182 192.481,64.515 192.062,64.934 192.062,76.568 v1(192.176,76.683)
  BC1 w0.15: v1(162.488,35.266) 162.128,34.906 162.128,32.309 162.316,32.121 162.843,32.121 165.347,29.616 174.579,29.616 181.152,36.19 U36.42@183.365,36.19 184.428,36.19 184.823,36.585 187.522,36.585 v1(188.08,37.143)
SA12: U21.68 U35.22 U36.41 U37.1 U59.5 U74.179 | length 108.4
  FC1 w0.15: U59.5@156.8,60.69 155.651,60.69 155.448,60.487 155.448,56.109 155.626,55.931 157.759,55.931 159.664,54.026 159.664,51.287 157.861,49.484 157.861,36.576 158.468,35.969 U74.179@161.458,35.969 162.303,35.969 v1(162.509,35.763) ; 188.389,44.808 188.417,44.78 188.62,44.983 U35.22@188.62,46.4 188.62,47.27 v1(188.417,47.473) ; v1(192.682,74.12) U21.68@192.682,75.491
  FC3 w0.15: v1(192.227,49.327) 193.777,50.876 193.777,55.321 193.875,55.42 193.875,56.032 193.29,56.618 193.29,68.889 192.682,69.497 v1(192.682,74.12)
  FC4 w0.15: v1(162.509,35.763) 181.508,35.763 182.148,36.402 v1@182.148,36.952 ; v1(188.417,47.473) 190.373,47.473 v1(192.227,49.327)
  BC3 w0.15: v1(182.11,36.99) 185.903,40.783 185.903,44.298 186.413,44.808 188.389,44.808
  BC1 w0.15: v1@182.148,36.952 v1(182.11,36.99) U36.41@183.34,36.99 ; v1(192.682,74.12) 193.599,73.203 195.997,73.203 197.46,71.74 U37.1@197.85,71.74
SA13: U21.69 U37.2 U59.4 U74.181 | length 81.9
  FC1 w0.15: v1(155.97,60.19) U59.4@156.8,60.19 v1(157.675,60.19) ; U74.181@161.458,36.969 162.521,36.969 v1(162.724,37.172) ; v1(193.182,72.619) U21.69@193.182,75.491
  IC1 w0.15: v1(155.97,60.19) 156.769,59.391 156.769,58.886 157.199,58.456 157.199,58.091 159.741,55.549 159.741,50.495 164.897,45.339 164.897,39.345 v1(162.724,37.172) ; v1(193.182,72.619) 197.206,72.619 v1(198.73,71.095)
  FC4 w0.15: v1(157.675,60.19) 159.373,61.888 175.629,61.888 179.451,65.71 185.586,65.71 185.916,65.38 186.487,65.38 193.182,72.075 v1(193.182,72.619)
  BC1 w0.15: U37.2@197.85,71.09 198.725,71.09 v1(198.73,71.095)
SA14: U21.70 U35.24 U59.3 U74.182 | length 90.5
  FC1 w0.15: U59.3@156.8,59.69 157.709,59.69 158.188,59.21 158.188,56.01 159.944,54.254 159.944,51.175 158.115,49.346 158.115,38.202 158.848,37.469 U74.182@161.458,37.469 162.509,37.469 v1(162.712,37.672) ; v1(186.386,47.066) 186.799,47.48 187.394,47.48 ; v1(186.512,48.362) 187.394,47.48 ; U35.24@187.62,46.4 187.62,47.254 187.394,47.48 ; v1(193.675,74.295) 193.682,74.302 U21.70@193.682,75.491
  IC2 w0.15: v1(162.712,37.672) 164.842,39.802 175.26,39.802 181.21,45.751 184.486,45.751 185.801,47.066 v1(186.386,47.066)
  BC3 w0.15: v1(186.512,48.362) 187.705,49.554 187.705,53.872 191.11,57.277 191.11,64.389 193.878,67.158 193.878,74.092 v1(193.675,74.295)
SA15: U21.71 U35.25 U59.2 U74.183 | length 107.7
  FC1 w0.15: v1(155.97,59.19) U59.2@156.8,59.19 ; U74.183@161.458,37.969 162.302,37.969 v1(162.509,38.176) ; U35.25@187.02,46.4 187.02,45.523 v1(187.223,45.32) ; v1(192.71,76.683) 193.903,76.683 194.182,76.403 U21.71@194.182,75.491
  FC3 w0.15: v1(187.223,45.32) 186.818,44.914 186.818,44.094 186.94,43.972 189.378,43.972 189.916,43.434 190.881,43.434 191.135,43.688 191.135,53.7 193.06,55.625 193.06,68.702 192.303,69.458 192.303,76.276 v1(192.71,76.683)
  IC1 w0.15: v1(155.97,59.19) 155.97,58.483 156.693,57.76 156.693,51.003 161.468,46.228 161.468,39.218 v1(162.509,38.176)
  BC4 w0.15: v1(155.97,59.19) 162.273,59.19 171.653,49.809 184.455,49.809 187.223,47.041 v1(187.223,45.32)
SD0: J11.41 R375.1 U21.96 U22.46 U35.33 U36.17 U42.22 U49.3 U59.25 U61.35 U67.3 U74.189 | length 376.9
  FC1 w0.15: v1(93.2,67.165) U22.46@93.2,68.66 ; U61.35@112.028,111.057 112.903,111.057 v1(113.106,110.854) ; v1(135.255,66.19) U59.25@137,66.19 ; v1@160.432,40.969 U74.189@161.458,40.969 ; U35.33@185.57,41.25 186.31,41.25 186.31,41.174 186.523,41.174 v1(186.65,41.047) ; J11.41@186.358,143.972 v1(190.652,143.972) ; U21.96@196.732,88.991 v1(197.912,88.991) ; U67.3@204.185,85.558 v1(205.415,85.558) ; v1(215.852,126.145) U42.22@215.852,127.375
  FC2 w0.15: v1(113.36,66.65) v1(133.375,66.65) ; v1@160.432,40.969 v1(160.426,40.97) 169.876,40.97 170.283,41.377 186.31,41.377 v1@186.64,41.047
  FC3 w0.15: v1(113.106,110.854) 114.097,109.863 114.097,108.584 114.274,108.407 114.274,104.289 113.538,103.553 113.538,99.263 113.335,99.06 113.335,98.4 113.97,97.765 113.97,95.148 114.122,71.933 114.478,71.577 114.478,67.767 v1(113.36,66.65) ; v1@186.64,41.047 v1(186.65,41.047) 187.346,40.351 187.346,38.405 187.142,38.202 186.36,38.202 186.03,38.532 186.03,48.971 186.893,49.835 186.893,67.54 187.477,68.123 187.477,73.329 187.044,73.762 187.044,74.522 188.824,76.302 188.824,84.986 v1(188.445,85.365)
  IC2 w0.15: v1(188.445,85.365) 189.948,86.868 195.789,86.868 v1(197.912,88.991)
  FC4 w0.15: 84.836,109.931 109.499,109.931 110.422,110.854 v1(113.106,110.854)
  BC4 w0.15: v1(93.2,67.165) 96.56,63.805 110.515,63.805 v1(113.36,66.65) ; v1(133.375,66.65) 137.77,62.255 ; v1(135.255,66.19) 135.255,65.075 137.77,62.56 137.77,62.255 ; v1(160.426,40.97) 161.138,41.681 ; v1(169.723,43.993) 168.173,42.443 161.9,42.443 161.138,41.681 ; v1(190.652,143.972) 201.188,133.437 203.977,133.437 204.272,133.142 204.272,128.239 205.13,127.381 214.616,127.381 v1(215.852,126.145) ; 137.77,62.255 140.487,59.538 140.487,57.556 145.567,52.476 150.901,52.476 158.521,44.856 160.579,44.856 161.138,44.298 161.138,41.681
  BC3 w0.15: v1(197.912,88.991) 201.345,85.558 203.49,85.558 205.415,87.483 ; v1(205.415,85.558) 205.415,87.483 ; v1(215.852,126.145) 215.852,119.101 210.109,113.357 210.109,95.275 207.62,92.786 207.62,89.687 205.415,87.483
  BC1 w0.15: R375.1@81.51,106.09 81.909,106.09 84.734,108.915 84.734,109.83 84.836,109.931 ; U36.17@168.29,44.19 169.526,44.19 v1(169.723,43.993) ; v1(188.445,85.365) U49.3@189.6,85.365
SD1: J11.43 R374.1 U21.95 U22.47 U35.34 U36.19 U42.21 U49.4 U59.26 U61.36 U67.2 U74.190 | length 374.6
  FC1 w0.15: U22.47@93.7,68.66 v1(93.701,69.748) ; v1(110.947,111.557) U61.36@112.028,111.557 ; U59.26@137,65.69 v1(137.846,65.69) ; v1@160.436,41.469 U74.190@161.458,41.469 ; v1(181.516,38.938) 182.065,39.487 182.065,40.461 182.169,40.565 182.787,40.565 182.915,40.437 182.915,39.827 183.63,39.112 183.689,39.112 184.506,39.929 184.506,40.547 184.709,40.75 U35.34@185.57,40.75 ; J11.43@186.358,145.273 v1(191.811,145.273) ; v1(194.92,87.853) 195.557,88.491 U21.95@196.732,88.491 ; v1(202.946,86.058) U67.2@204.185,86.058 ; v1(215.352,125.324) U42.21@215.352,127.375 v1(215.352,130.048)
  FC2 w0.15: v1(127.178,64.491) 127.051,64.364 106.552,64.364 106.298,64.618 106.298,67.005 102.335,70.968 96.647,70.968 96.317,71.298 94.615,71.298 93.701,70.383 ; v1@160.436,41.469 v1(160.426,41.478) 160.071,41.123 160.071,40.742 160.223,40.589 178.892,40.589 180.543,38.938 v1(181.516,38.938) ; 93.7,70.383 v1(93.701,69.748) 93.701,70.383
  IC1 w0.15: v1(169.545,45.39) 162.23,52.705 162.23,60.63 161.747,61.112 160.503,61.112 157.302,64.313 155.473,64.313 154.483,65.303 ; 154.483,65.303 153.467,66.319 v1(151.384,66.319) 152.4,65.303 154.483,65.303
  IC2 w0.15: v1(137.846,65.69) 138.532,65.69 138.598,65.625 139.243,65.625 139.308,65.69 150.755,65.69 v1(151.384,66.319) 160.198,75.133 161.011,75.133 161.646,75.768 166.903,75.768 175.666,84.531 v1(190.83,84.531)
  IC4 w0.15: v1(160.426,41.478) 164.338,45.39 v1(169.545,45.39)
  FC4 w0.15: v1(79.197,102.997) 79.197,103.429 80.467,104.699 87.528,104.699 88.544,103.683 v1(106.883,103.683) ; v1(127.178,64.491) 136.646,64.491 v1(137.846,65.69)
  BC2 w0.15: v1(79.728,97.284) 79.731,97.282 79.807,97.206 79.807,92.786 78.74,91.719 78.74,86.258 82.55,82.448 82.55,80.899 v1(93.701,69.748) ; v1(190.83,84.531) 192.653,84.531 194.92,86.798 v1(194.92,87.853)
  BC4 w0.15: v1(191.811,145.273) 194.351,145.273 209.575,130.048 v1(215.352,130.048)
  BC3 w0.15: v1(202.946,86.058) 202.946,92.201 203.372,92.627 207.029,92.627 209.652,95.25 209.652,119.623 v1(215.352,125.324)
  BC1 w0.15: v1(79.197,102.997) 79.4,102.997 79.728,102.669 v1(79.728,97.284) ; v1@79.731,97.282 79.731,100.381 80.137,100.787 80.67,100.787 81.178,100.279 R374.1@81.51,100.09 ; v1(106.883,103.683) 106.883,107.493 v1(110.947,111.557) ; U36.19@168.29,45.79 169.266,45.79 169.266,45.669 v1(169.545,45.39) ; U49.4@189.6,84.715 190.646,84.715 v1(190.83,84.531)
SD2: J11.45 R376.1 U21.94 U22.48 U35.35 U36.21 U42.19 U49.5 U59.27 U61.37 U67.1 U74.193 | length 361.9
  FC1 w0.15: 94.2,67.573 U22.48@94.2,68.66 ; U61.37@112.028,112.057 v1(113.309,112.057) ; v1(135.763,65.405) 135.978,65.19 U59.27@137,65.19 ; 160.426,42.969 U74.193@161.458,42.969 ; U35.35@185.57,40.25 v1(186.65,40.25) ; J11.45@186.358,146.522 v1(189.967,146.522) ; U21.94@196.732,87.991 197.668,87.991 197.917,88.24 197.917,88.443 198.018,88.544 ; U67.1@204.185,86.658 205.415,86.658 205.435,86.678 v1(205.435,88.087) ; v1(214.351,129.362) 214.352,129.362 U42.19@214.352,127.375
  FC2 w0.15: 198.018,88.544 202.717,88.544 203.175,88.087 v1(205.435,88.087)
  FC3 w0.15: v1(205.435,88.087) 206.781,89.433 206.781,117.602 213.106,123.927 213.106,127.381 214.351,128.626 214.352,128.624
  IC1 w0.15: v1(83.795,94.082) 83.946,92.43 83.946,91.466 86.208,89.205 86.766,89.205 86.97,89.002 86.97,87.139 87.845,86.264 87.845,82.024 88.648,81.221 88.648,73.125 99.087,62.686 99.087,60.552 v1(99.492,60.147) ; v1(186.65,40.25) 185.826,41.074 185.826,81.458 v1(188.443,84.074) v1@188.452,84.065
  IC4 w0.15: v1(83.795,94.082) 87.826,94.082 99.332,105.588 106.84,105.588 v1(113.309,112.057)
  FC4 w0.15: v1(99.492,60.147) 102.585,63.241 108.209,63.241 108.336,63.368 113.866,63.368 115.903,65.405 v1(135.763,65.405)
  BC2 w0.15: v1(79.299,102.09) 79.299,99.289 83.795,94.793 v1(83.795,94.082) ; v1(135.763,65.405) 136.525,64.643 136.525,61.366 139.36,58.532 145.227,58.532 146.05,57.709 148.641,57.709 150.699,55.651 151.231,55.651 151.511,55.371 151.511,53.095 152.663,51.943 152.663,46.117 156.032,42.748 165.506,42.748 168.808,46.05 168.808,47.041 v1(169.545,47.777) ; v1(188.443,84.074) 193.548,84.074 198.018,88.544
  BC4 w0.15: v1(169.545,47.777) 171.221,49.454 181.534,49.454 183.337,47.65 183.337,46.711 187.02,43.028 187.02,40.62 v1(186.65,40.25) ; v1(189.967,146.522) 200.981,135.508 203.658,135.508 209.804,129.362 v1(214.351,129.362)
  BC1 w0.15: R376.1@78.51,102.09 v1(79.299,102.09) ; U36.21@168.29,47.39 169.24,47.39 169.24,47.473 v1(169.545,47.777) ; v1@188.452,84.065 U49.5@189.6,84.065
SD3: J11.3 R373.1 U21.93 U22.49 U35.36 U36.23 U42.18 U49.6 U59.28 U61.38 U67.64 U74.194 | length 360.1
  FC1 w0.15: U22.49@94.7,68.66 94.7,69.478 v1(94.971,69.748) ; v1(110.947,112.557) U61.38@112.028,112.557 ; U59.28@137,64.69 v1(137.83,64.69) ; v1(160.428,43.469) U74.194@161.458,43.469 ; U35.36@185.57,39.75 186.664,39.75 ; J11.3@186.358,119.873 188.163,119.873 ; v1(188.737,120.447) 188.163,119.873 ; v1(191.476,83.415) v1(195.552,87.491) U21.93@196.732,87.491 197.764,87.491 198.526,88.253 198.526,105.131 196.139,107.518 191.008,107.518 190.449,108.077 190.449,117.587 188.163,119.873 ; U67.64@206.085,88.558 v1(206.085,90.195) ; v1(213.852,125.781) U42.18@213.852,127.375
  FC2 w0.15: v1(195.552,87.491) 197.545,89.484 205.374,89.484 v1(206.085,90.195)
  IC4 w0.15: v1(79.096,88.544) 78.867,88.773 78.867,92.126 80.035,93.294 82.271,93.294 89.103,100.127 93.421,100.127 99.212,105.918 106.578,105.918 113.157,112.497 113.284,112.497 113.462,112.674 113.462,113.208 113.284,113.386 111.776,113.386 v1(110.947,112.557)
  FC4 w0.15: v1(188.737,120.447) 188.813,120.371 202.87,120.371 207.771,125.273 213.344,125.273 v1(213.852,125.781)
  BC2 w0.15: v1(79.096,88.544) 79.096,86.258 92.126,73.228 93.574,73.228 94.971,71.831 v1(94.971,69.748) 95.377,70.155 98.781,70.155 99.847,71.222 112.319,71.222 112.751,70.79 134.747,70.79 138.201,67.335 138.201,65.061 v1(137.83,64.69) 139.551,64.69 143.383,60.858 145.999,60.858 150.977,55.881 151.548,55.881 152.349,55.08 152.349,53.34 152.893,52.796 152.893,50.983 160.407,43.469 v1(160.428,43.469) 160.571,43.612 163.449,43.612 v1(169.57,49.733)
  BC4 w0.15: v1(173.076,48.99) 173.31,48.99 182.549,39.751 186.663,39.751 186.664,39.75
  BC3 w0.15: v1(169.57,49.733) 170.459,49.733 ; 169.716,48.99 170.459,49.733 ; v1(191.271,83.21) v1(190.957,83.21) 190.754,83.21 185.039,77.496 185.039,71.806 180.518,67.285 180.518,59.792 170.459,49.733
  BC1 w0.15: v1(79.096,88.544) 79.578,89.027 79.578,89.611 79.299,89.891 76.759,89.891 76.022,90.627 76.022,97.511 77.927,99.416 77.927,104.318 78.435,104.826 80.874,104.826 81.178,104.521 81.178,104.09 R373.1@81.51,104.09 ; U36.23@168.29,48.99 v1(173.076,48.99) ; U49.6@189.6,83.415 190.753,83.415 v1(190.957,83.21)
SD4: J11.5 R378.1 U21.92 U22.51 U35.39 U36.26 U42.17 U49.7 U59.32 U61.39 U67.63 U74.196 | length 370.9
  FC1 w0.15: U22.51@96.7,70.21 102.078,70.21 103.2,69.088 103.2,62.281 103.632,61.849 110.795,61.849 v1(111.379,61.265) ; U61.39@112.028,113.057 112.901,113.057 v1(113.106,112.852) ; v1(135.433,63.475) 136.217,62.69 U59.32@137,62.69 ; v1@160.433,44.469 U74.196@161.458,44.469 ; v1(182.118,49.403) 183.261,48.26 183.693,48.26 188.112,43.84 188.112,38.897 187.218,38.003 186.835,38.003 186.588,38.25 U35.39@185.57,38.25 ; J11.5@186.358,121.172 v1(188.388,121.172) v1(190.144,121.172) ; U21.92@196.732,86.991 v1(197.912,86.991) ; v1(205.994,85.42) 206.451,85.42 206.685,85.654 U67.63@206.685,88.558 ; U42.17@213.352,127.375 213.352,128.61 v1(213.36,128.618)
  FC3 w0.15: v1(111.379,61.265) 112.979,62.865 112.979,66.98 113.13,67.131 113.13,70.358 113.741,70.969 113.741,80.493 112.751,81.483 ; v1(113.106,112.852) 112.751,112.497 112.751,83.49 ; 112.751,81.483 112.751,83.49 ; 112.751,81.483 112.344,81.89 112.344,83.083 112.751,83.49
  IC1 w0.15: v1(190.144,121.172) 190.144,110.312 194.361,106.096 194.361,100.1 195.399,99.062 195.399,94.898 196.571,93.726 196.571,88.332 v1(197.912,86.991)
  IC2 w0.15: v1(188.388,121.172) 194.595,127.38 212.123,127.38 v1(213.36,128.618)
  IC3 w0.15: v1(188.443,82.753) 190.297,80.899 190.297,74.117 189.154,72.974 189.154,66.65 190.627,65.176 v1(190.627,61.443)
  IC4 w0.15: v1(78.51,99.492) 79.501,100.482 93.37,100.482 99.136,106.248 106.502,106.248 v1(113.106,112.852) ; v1(160.43,44.472) 162.16,46.203 163.424,46.203 164.516,47.295 169.951,47.295 172.06,49.403 v1(182.118,49.403)
  FC4 w0.15: v1(111.379,61.265) 112.928,62.814 134.772,62.814 v1(135.433,63.475) ; v1(188.443,82.753) 188.454,82.765 189.509,83.82 195.275,83.82 196.063,84.607 204.191,84.607 204.775,85.192 ; v1(197.912,86.991) 198.632,86.991 199.923,85.7 203.683,85.7 204.191,85.192 204.775,85.192 ; v1(205.994,85.42) 205.765,85.192 204.775,85.192
  BC4 w0.15: v1(135.433,63.475) 140.03,58.877 140.03,52.934 143.688,49.276 152.324,49.276 157.124,44.475 ; v1(160.43,44.472) 160.426,44.475 157.124,44.475 ; v1@160.433,44.469 157.131,44.469 157.124,44.475
  BC1 w0.15: v1(78.51,99.492) R378.1@78.51,100.09 ; v1(182.118,49.403) 182.118,49.142 182.27,48.99 U36.26@183.34,48.99 184.302,48.99 184.455,49.142 184.455,55.474 190.424,61.443 v1(190.627,61.443) ; v1@188.454,82.765 U49.7@189.6,82.765
SD5: J11.7 R377.1 U21.91 U22.52 U35.40 U36.28 U42.16 U49.8 U59.33 U61.40 U67.62 U74.197 | length 344.4
  FC1 w0.15: U22.52@96.7,70.76 97.642,70.76 v1(97.79,70.612) ; v1(109.366,113.557) U61.40@112.028,113.557 ; v1(136.169,62.19) U59.33@137,62.19 ; U74.197@161.458,44.969 v1@162.498,44.969 ; v1(180.797,36.373) 181.966,37.541 184.348,37.541 184.556,37.75 U35.40@185.57,37.75 ; v1(180.797,71.425) 180.797,63.195 181.305,62.687 181.305,58.141 182.296,57.15 182.296,51.206 181.712,50.622 181.712,47.992 v1(182.11,47.593) ; J11.7@186.358,122.423 212.547,122.423 212.852,122.727 ; v1(190.754,81.912) 195.333,86.491 U21.91@196.732,86.491 v1(198.388,86.491) ; U67.62@207.185,88.558 207.185,89.786 v1(207.188,89.789) 207.67,90.17 210.313,90.17 212.852,92.709 212.852,122.727 ; U42.16@212.852,127.375 212.852,126.39 213.106,126.136 213.106,122.981 212.852,122.727
  FC2 w0.15: v1(97.79,70.612) 97.79,67.031 101.676,63.144 110.261,63.144 110.465,62.941 129.811,62.941 130.359,62.393 135.549,62.393 135.752,62.19 v1(136.169,62.19)
  FC3 w0.15: v1(135.306,46.812) 133.68,48.438 133.68,53.746 136.525,56.591 136.525,61.834 v1(136.169,62.19)
  IC2 w0.15: v1(162.509,44.958) 168.605,44.958 171.24,47.593 v1(182.11,47.593) v1@182.11,47.549 ; v1(198.388,86.491) 199.048,87.151 199.048,88.457 199.542,88.951 206.35,88.951 v1(207.188,89.789)
  IC3 w0.15: v1(180.797,36.373) 182.474,38.049 182.474,47.23 v1(182.11,47.593)
  IC4 w0.15: v1(180.797,71.425) 180.797,73.203 184.81,77.216 184.81,80.543 186.179,81.912 v1(190.754,81.912)
  FC4 w0.15: v1(87.706,110.287) 106.096,110.287 v1(109.366,113.557) ; v1(135.306,46.812) 136.601,46.812 138.1,45.314 162.154,45.314 162.498,44.969 v1(162.509,44.958)
  BC2 w0.15: v1(80.315,86.233) 86.893,79.654 88.646,79.654 91.999,76.302 91.999,75.184 92.583,74.6 95.91,74.6 96.52,73.99 96.52,71.882 v1(97.79,70.612)
  BC1 w0.15: v1(80.315,86.233) 80.772,86.69 80.772,90.678 80.061,91.389 80.061,94.31 81.51,95.759 R377.1@81.51,96.09 81.51,96.623 82.728,97.841 82.728,101.092 86.258,104.623 86.258,108.839 v1(87.706,110.287) ; v1@182.11,47.549 182.269,47.39 U36.28@183.34,47.39 ; U49.8@189.6,82.115 190.551,82.115 v1(190.754,81.912)
SD6: J11.9 R381.1 U21.89 U22.53 U35.41 U36.30 U42.14 U49.9 U59.34 U61.41 U67.61 U74.199 | length 408.9
  FC1 w0.15: v1(95.606,70.815) 95.606,71.158 ; v1(108.407,114.057) U61.41@112.028,114.057 ; v1(135.814,61.69) U59.34@137,61.69 v1(139.217,61.69) ; U74.199@161.458,45.969 162.285,45.969 v1(162.488,45.766) ; U35.41@185.57,37.25 186.792,37.25 187.388,37.846 188.112,37.846 v1(188.57,37.389) ; J11.9@186.358,123.722 v1(188.747,123.722) ; 195.56,85.491 U21.89@196.732,85.491 ; U67.61@207.685,88.558 207.685,87.084 v1(208.36,86.409) ; U42.14@211.852,127.375 211.852,126.39 212.097,126.145 v1(212.258,126.145) ; 95.606,71.158 95.707,71.26 U22.53@96.7,71.26 95.606,71.158
  FC2 w0.15: v1(95.606,70.815) 97.232,69.189 97.232,64.465 99.201,62.496 129.445,62.496 129.778,62.163 135.341,62.163 v1(135.814,61.69) ; v1(179.089,45.79) 183.851,45.79 187.02,42.621 187.02,39.284 188.57,37.735 v1(188.57,37.389) ; v1(188.747,123.722) 198.138,123.722 200.933,126.517 211.886,126.517 v1(212.258,126.145)
  IC1 w0.15: v1(188.747,123.722) 199.034,113.435 199.034,101.625 205.664,94.996 205.664,89.105 v1(208.36,86.409)
  IC2 w0.15: v1(139.217,61.69) 144.533,61.69 149.149,57.074 149.149,49.073 149.377,48.844 159.41,48.844 v1(162.488,45.766)
  IC3 w0.15: v1(168.021,58.547) 168.021,56.858 v1(179.089,45.79)
  IC4 w0.15: v1(80.442,103.353) 82.626,105.537 96.164,105.537 104.684,114.057 v1(108.407,114.057) ; v1(168.021,58.547) 174.632,65.158 177.853,65.158 177.986,65.024 v1(178.054,65.024)
  FC4 w0.15: v1(162.488,45.766) 162.798,46.076 164.795,46.076 165.913,44.958 165.913,41.046 166.37,40.589 173.888,40.589 v1(179.089,45.79) ; 195.453,85.496 195.555,85.496 ; 195.56,85.491 195.555,85.496 ; v1(208.36,86.409) 207.545,87.224 201.346,87.224 200.457,88.113 198.171,88.113 195.555,85.496
  BC4 w0.15: v1(80.442,103.353) 80.035,102.946 80.035,101.6 79.553,101.117 76.073,101.117 64.922,89.967 64.922,89.662 68.072,86.512 78.842,86.512 91.719,73.635 92.786,73.635 v1(95.606,70.815) ; 188.45,81.465 188.443,81.458 191.414,81.458 195.453,85.496
  BC1 w0.15: v1(80.442,103.353) 80.442,103.319 80.814,102.946 80.977,102.946 81.51,102.413 R381.1@81.51,102.09 ; v1(179.089,45.79) 182.277,45.79 ; U36.30@183.34,45.79 182.277,45.79 ; U49.9@189.6,81.465 186.418,81.465 185.826,80.874 185.826,77.419 185.852,73.914 182.397,70.46 181.955,70.46 181.051,69.556 181.051,65.786 182.194,64.643 182.905,64.643 183.134,64.414 183.134,62.154 183.591,61.697 183.591,51.206 183.032,50.648 181.991,50.648 181.737,50.394 181.737,46.33 182.277,45.79
SD7: R380.1 U21.88 U22.54 U35.42 U36.32 U49.10 U59.35 U61.42 U67.60 U74.200 | length 277.6
  FC1 w0.15: U22.54@96.7,71.76 97.582,71.76 v1(97.993,71.349) ; 111.026,114.557 U61.42@112.028,114.557 ; v1(136.17,61.19) U59.35@137,61.19 ; U74.200@161.458,46.469 162.221,46.469 v1@162.424,46.672 ; v1(181.788,36.576) 182.757,36.576 182.931,36.75 U35.42@185.57,36.75 ; U21.88@196.732,84.991 197.818,84.991 ; U67.60@208.185,88.558 v1(208.185,89.789)
  FC2 w0.15: v1@162.424,46.672 v1(162.488,46.672) 162.679,46.863 166.167,46.863 166.98,46.05 173.533,46.05 175.596,43.987 v1(181.907,43.987)
  FC3 w0.15: v1(181.788,36.576) 181.585,36.779 180.848,36.779 180.34,37.287 180.34,43.485 180.842,43.987 v1(181.907,43.987)
  IC1 w0.15: v1(84.125,104.267) 84.125,104.216 89.383,98.958 89.383,96.063 90.119,95.326 90.119,92.558 92.075,90.602 92.075,88.976 92.532,88.519 92.532,86.131 93.599,85.065 93.599,84.125 94.082,83.642 94.894,83.642 95.657,82.879 95.657,80.473 100.051,76.08 100.051,71.831 99.568,71.349 v1(97.993,71.349)
  IC2 w0.15: 197.818,84.991 198.374,85.547 203.943,85.547 v1(208.185,89.789)
  IC3 w0.15: v1(157.556,55.067) 158.166,54.457 158.166,51.119 157.963,50.916 157.963,49.712 161.003,46.672 v1(162.488,46.672)
  IC4 w0.15: v1(84.125,104.267) 85.065,105.207 96.317,105.207 103.759,112.649 109.118,112.649 111.026,114.557
  FC4 w0.15: v1(136.17,61.19) 140.603,56.757 146.355,56.757 146.775,56.337 151.028,56.337 152.298,55.067 v1(157.556,55.067)
  BC2 w0.15: v1(191.16,80.815) 193.657,83.312 194.716,83.312 196.395,84.991 197.818,84.991 197.917,85.09 197.917,84.991
  BC4 w0.15: v1(97.993,71.349) 103.302,71.349 106.324,68.326 108.585,68.326 109.118,68.859 120.929,68.859 128.599,61.19 v1(136.17,61.19)
  BC3 w0.15: v1(181.907,43.987) 184.982,43.987 187.808,46.812 187.808,49.301 188.038,49.531 188.038,52.96 196.037,60.959 196.037,76.428 197.206,77.597 200.457,77.597 200.889,78.029 200.889,82.019 197.917,84.991
  BC1 w0.15: R380.1@81.51,98.09 81.51,98.908 82.017,99.414 82.017,102.819 82.423,103.226 83.083,103.226 v1(84.125,104.267) ; v1(181.907,43.987) 182.11,43.987 182.313,44.19 U36.32@183.34,44.19 ; U49.10@189.6,80.815 v1(191.16,80.815)
SD8: J11.44 U36.18 U42.9 U61.44 U74.143 | length 280.6
  FC1 w0.15: U61.44@112.028,115.557 112.751,115.557 112.991,115.317 115.926,115.317 115.976,115.367 ; U74.143@152.808,22.819 152.808,23.849 ; v1(184.328,145.872) J11.44@186.358,145.873 ; U42.9@209.352,127.375 v1(209.352,129.032)
  FC3 w0.15: v1(184.328,145.872) 186.487,143.713 v1(186.487,118.085)
  IC1 w0.15: 115.976,115.367 117.45,115.494 124.816,108.128 137.363,108.128 137.795,107.696 137.795,75.311 153.543,59.563 156.108,59.563 156.337,59.334 156.337,58.979 156.794,58.522 156.794,57.988 158.166,56.617 158.166,52.07 159.461,50.775 159.461,49.047 159.969,48.539 161.366,48.539 164.541,45.364 v1(164.541,43.967)
  FC4 w0.15: 115.976,115.367 127.66,115.367 127.838,115.545 177.444,115.545 178.079,116.18 182.245,116.18 184.15,118.085 v1(186.487,118.085) ; 152.808,23.849 152.806,23.851 152.806,28.016 151.435,29.388 151.435,40.97 152.984,42.52 163.093,42.52 v1(164.541,43.967)
  BC4 w0.15: v1(184.328,145.872) 185.522,144.678 191.44,144.678 201.447,134.671 203.987,134.671 204.502,134.156 204.502,132.251 207.721,129.032 v1(209.352,129.032)
  BC1 w0.15: v1(164.541,43.967) 165.564,44.99 U36.18@168.29,44.99